# Altium PCB Copy of ESP32.PcbDoc
Units mm, origin at the board's own origin, x right, y up, seen from the top; angles counter-clockwise.
Board outline 32.26 x 92 mm, 4 copper layers (Top Layer, Int1 (GND), Int2 (PWR), Bottom Layer), stack 1.591 mm thick; 55 components, 46 nets, 241 pads, 97 vias.
Unrouted connection lines stored in the file: 1.
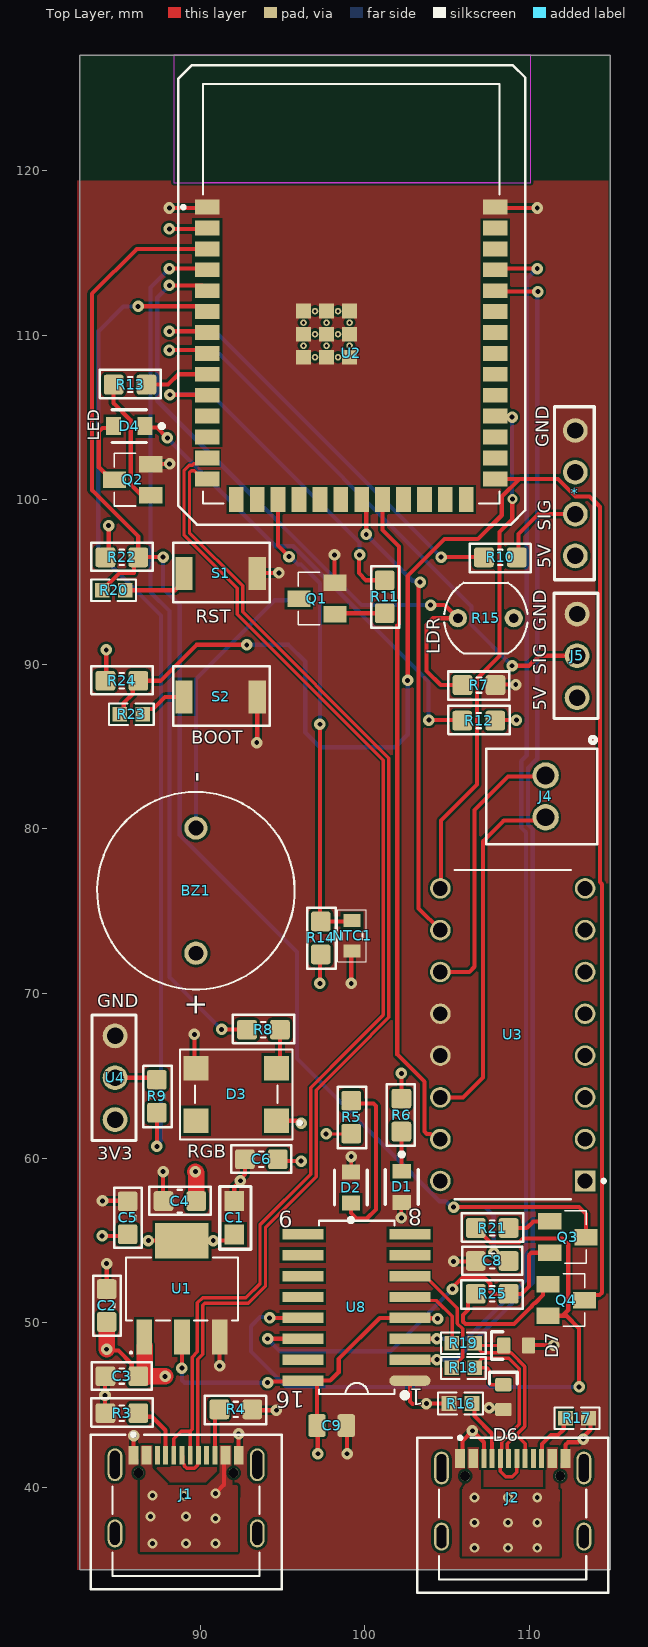
[diagram p0: Top Layer view]
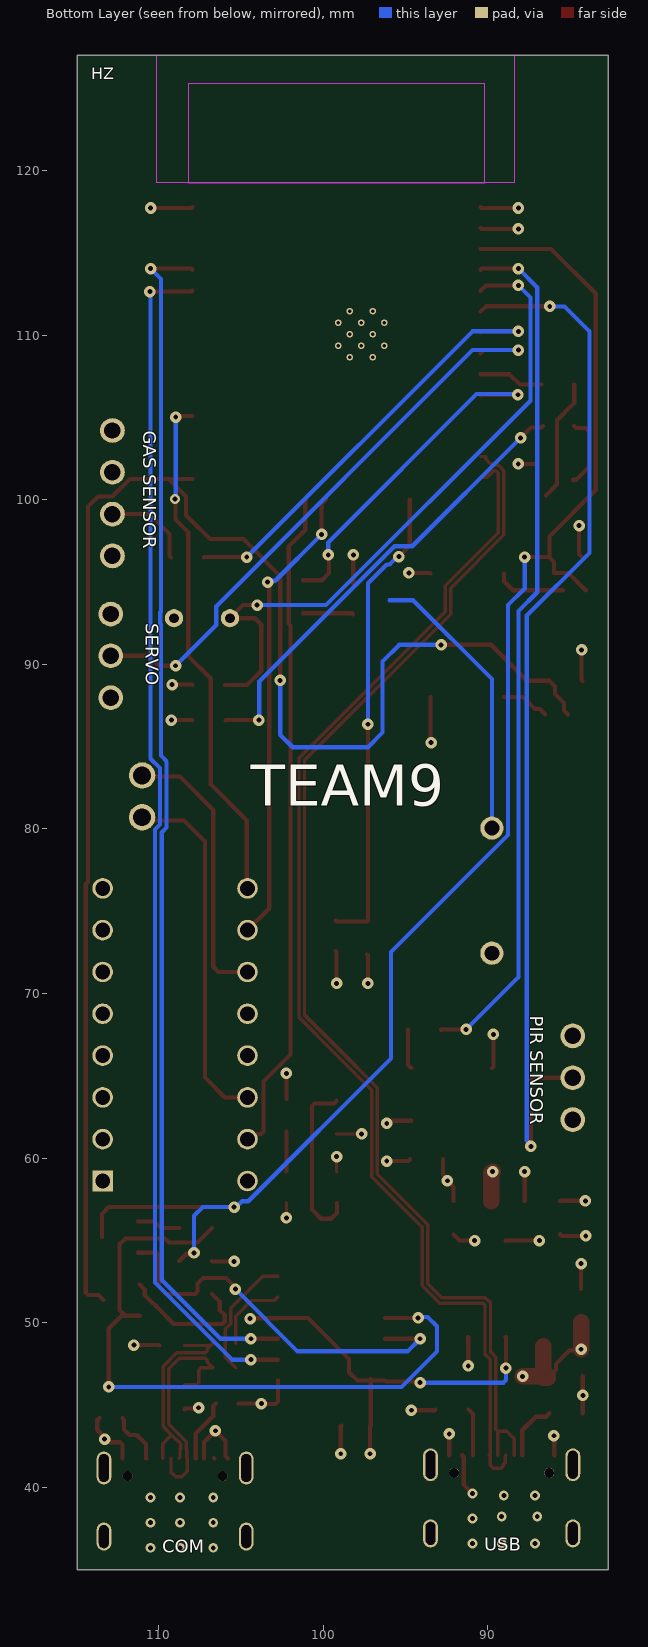
[diagram p1: Bottom Layer view, seen from below]
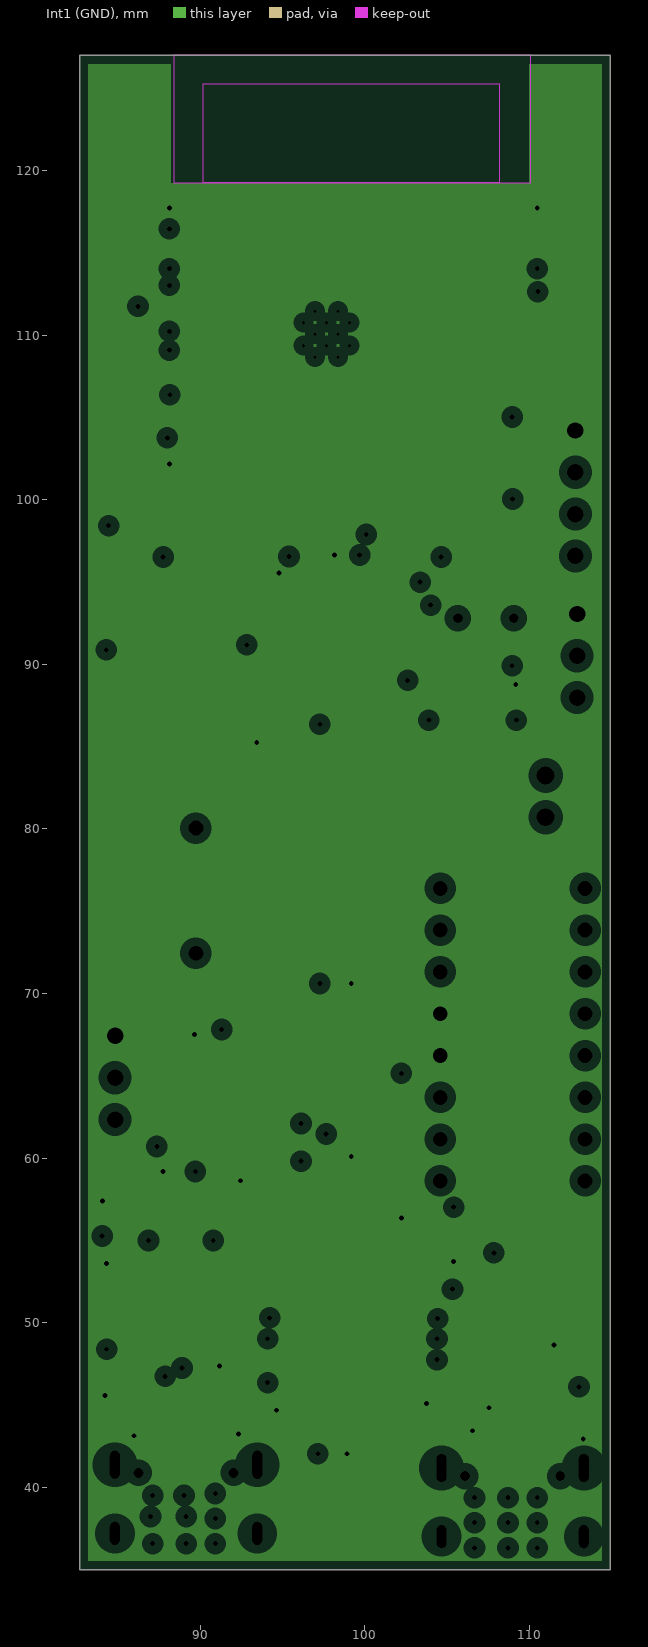
[diagram p2: Int1 (GND), clearances drawn from the general rule]
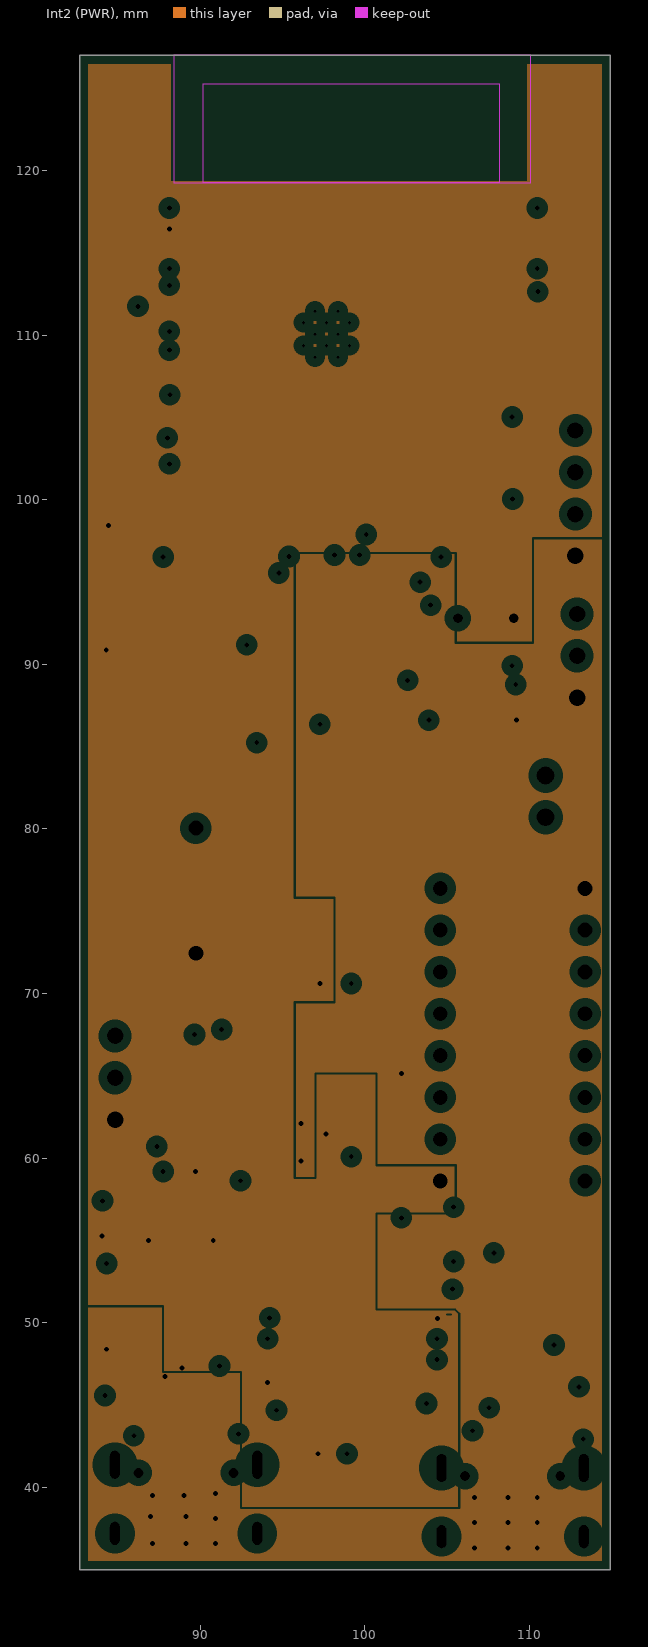
[diagram p3: Int2 (PWR), clearances drawn from the general rule]

## Layer stack, top to bottom
Top Solder: solder mask 0.0254, SM-001, Dk 4
Top Layer: signal copper 0.035
Dielectric 2: prepreg 0.2104, PP-017, Dk 4.3
Int1 (GND): plane copper 0.0175, net GND
Dielectric 3: core 1.065, Core-039, Dk 4.6
Int2 (PWR): plane copper 0.0175, net (Multiple Nets)
Dielectric 4: prepreg 0.2104, PP-017, Dk 4.3
Bottom Layer: signal copper 0.035
Bottom Solder: solder mask 0.0254, SM-001, Dk 4

## Board outline
82.677,35 114.935,35 114.935,127 82.677,127

## Design rules (kind name [scope] priority, off if disabled: settings)
Clearance "difff clearance" [InDifferentialPairClass('DIFF90')] p1: gap=0.102 ignorepadtopadclearanceinfootprint=TRUE
Clearance [All] p2: gap=0.152 ignorepadtopadclearanceinfootprint=TRUE
DiffPairsRouting DIFF90 [InDifferentialPairClass('All Differential Pairs')] p1: maxlimit=0.127 minlimit=0.127 mostfreqgap=0.127 toplayer_minwidth=0.102 toplayer_maxwidth=0.208 toplayer_prefwidth=0.208 bottomlayer_minwidth=0.102 bottomlayer_maxwidth=0.208 bottomlayer_prefwidth=0.208 impedanceprofiledriven=TRUE impedanceprofileid={DB8AAC73-E7F6-452D-B68F-6345AC02EC85} impedanceprofilevalue=90.000000 maxuncoupledlength=12.7
HoleToHoleClearance [All] p1: gap=0.203 allowstackedmicrovias=TRUE
PlaneClearance [All] p1: clearance=0.508
PlaneConnect [All] p1: planeconnectstyle=Direct reliefexpansion=0.508 reliefentries=4 reliefconductorwidth=0.254 reliefairgap=0.254
PolygonConnect [All] p1: connectstyle=Direct reliefconductorwidth=0.254 reliefentries=4 polygonreliefangle="90 Angle" airgapwidth=0.254
RoutingVias [All] p1: holewidth=0.3 width=0.7 viastyle="Through Hole" minholewidth=0.15 minwidth=0.25 maxholewidth=0.711 maxwidth=1.27
SolderMaskExpansion [All] p1: expansion=0.102 istentingtop=FALSE
SupplyNets "Schematic Supply Nets_4" [InNet('GND')] p1: voltage=0.000
SupplyNets "Schematic Supply Nets_3" [InNet('+3V3')] p2: voltage=0.000
SupplyNets "Schematic Supply Nets" [InNet('+5V')] p3: voltage=0.000
UnRoutedNet [All] p1: checkbadconnections=TRUE
Width [All] p1: maxlimit=1 minlimit=0.2 preferedwidth=0.254
25 further rules are at their usual default settings.

## Classes and differential pairs
differential pair class DIFF90: D DPP USBC
differential pair USBC: +USBC_P -USBC_N
differential pair DPP: +DPP_P -DPP_N
differential pair D: +D_P -D_N

## Components (designator, comment, footprint, x,y, rotation, side; value= is the part's Value field where it differs from the comment)
* "4 female header" "4 female header" 112.907,100.425 r90 top
BZ1 "buzzer" buzzer 89.75,76.25 r90 top
C1 "10uF" cap_0805 92.079,56.373 r270 top
C2 "0.1uF" CAPC1608X50N 84.328,51.039 r270 top
C3 "0.1uF" CAPC1608X50N 85.25,46.75 r0 top
C4 "22uF" CAPC2012X125N 88.777,57.389 r0 top
C5 "0.1uF" CAPC1608X50N 85.602,56.373 r270 top
C6 "CAP-0.1uF" CAPC1608X50N 93.726,59.929 r0 top
C8 "CAP-0.1uF" CAPC1608X50N 107.75,53.75 r0 top
C9 "cap_100nF" CAPC100nf 98,43.75 r180 top
D1 "RED LED" "RED LED" 101.981,58.547 r270 top
D2 "GREEN LED" "RED LED" 99.441,57.912 r90 top
D3 "RGB" RGB_LED 92.202,63.866 r180 top
D4 "RED LED" "RED LED" 86,104.75 r180 top
D6 "D_TVS_BI_0603" D_0603 108.331,45.593 r90 top
D7 "D_TVS_BI_0603" D_0603 109.093,48.514 r180 top
J1 "USB-TYPE C" "Korean Hroparts Elec TYPE-C-31-M-12" 89.154,37.196 r0 top
J2 "USB-TYPE C" "Korean Hroparts Elec TYPE-C-31-M-12" 109,37 r0 top
J4 "Motor_ter" motor_terminal 111,83.25 r270 top
J5 "servo" "3 pin header 100 mils" 112.907,90.519 r90 top
NTC1 "10Kohm" THERM_NTCG203NH103JT1S 99.237,73.502 r90 top
Q1 "MMSS8050-H-TP" "SOT 23-3" 97.1,93.873 r270 top
Q2 "MMSS8050-H-TP" "SOT 23-3" 85.906,101.093 r270 top
Q3 "MMSS8050-H-TP" "SOT 23-3" 112.35,55.327 r90 top
Q4 "MMSS8050-H-TP" "SOT 23-3" 112.25,51.5 r90 top
R3 "5.1Kohm" RES 85.25,44.5 r0 top
R4 "5.1Kohm" RES 92.177,44.729 r180 top
R5 "1Kohm" RES 99.187,62.484 r270 top
R6 "5.1Kohm" RES 102.235,62.611 r90 top
R7 "10Kohm" RES 106.95,88.741 r180 top
R8 "220ohm" RES 93.853,67.803 r0 top
R9 "10Kohm" RES 87.376,63.754 r270 top
R10 "RES-10Kohm" RES 108.25,96.5 r180 top
R11 "1Kohm" RES 101.219,94.107 r270 top
R12 "220ohm" RES 106.934,86.582 r0 top
R13 "1Kohm" RES 85.75,107 r0 top
R14 "10Kohm" RES 97.332,73.375 r270 top
R15 "gl5539" XDCR_PDV-P8003 107.364,92.805 r0 top
R16 "5.1K" RES_0603 105.829,45.085 r0 top
R17 "5.1K" RES_0603 112.903,44.196 r0 top
R18 "10R" RES_0603 106,47.25 r180 top
R19 "10R" RES_0603 106,48.75 r180 top
R20 "100R" RES_0603 84.75,94.5 r0 top
R21 "RES-10Kohm" RES 107.75,55.75 r0 top
R22 "RES-10Kohm" RES 85.25,96.5 r0 top
R23 "100R" RES_0603 85.827,86.97 r0 top
R24 "RES-10Kohm" RES 85.25,89 r0 top
R25 "RES-10Kohm" RES 107.75,51.75 r180 top
S1 "XUNPU TS-1088-AR02016" "XUNPU TS-1088-AR02016" 91.25,95.5 r0 top
S2 "XUNPU TS-1088-AR02016" "XUNPU TS-1088-AR02016" 91.25,88 r0 top
U1 "ic_AMS_1117" "ams1117 ic" 88.777,52.055 r90 top
U2 "ESP32-S3-WROOM-1" ESP32-S3-WROOM-1 99.187,112.522 r0 top
U3 "L293D" l293D 109,67.5 r180 top
U4 "PIR MODULE" "3 pin header 100 mils" 84.836,64.882 r90 top
U8 "CH340C" PCBComponent_1 99.2,52.1 r180 top

## Footprints (in the part's own frame and the unit in brackets; to place one, negate y for a bottom-side part, rotate by r counter-clockwise, add the part's x,y. Pads: shape width x height; smd on the part's side, far side on the other; paste and mask are expansions set on the pad)
"3 pin header 100 mils" [mm]
  round 1.5 hole 1 mask+0.3: 1(-2.54,0) 2(0,0) 3(2.54,0)
  silkscreen extent -3.81,-1.27 3.81,1.4, body extent -3.81,-1.27 3.81,1.27, height 8.74
"4 female header" [mm]
  round 1.5 hole 1 mask+0.3: 1(-3.835,0.102) 2(-1.295,0.102) 3(1.245,0.102) 4(3.785,0.102)
  silkscreen extent -5.28,-1.04 5.23,1.37, body extent -5.36,-1.09 5.31,1.45, height 8.51
"ams1117 ic" [mm]
  rect 2.15x0.95 smd: gnd(-2.925,-2.427) vin(-2.925,2.173) vout(-2.925,-0.127)
  rect 2.15x3.25 smd: vout(2.925,-0.127)
  silkscreen extent -3.94,-3.54 1.91,3.29, body extent -1.75,-3.38 1.75,3.12, height 1.8
buzzer [mm]
  round 1.408 hole 0.9: N(3.8,0) P(-3.8,0)
  silkscreen extent -6,-6 6,6, body extent -6,-6 6,6, height 7
cap_0805 [mm]
  rect 1.2x1.2 smd: 1(-1.016,0) 2(1.016,0)
  silkscreen extent -1.91,-0.89 1.9,1.02, body extent -1,-0.63 1,0.63, height 0.4
CAPC100nf [mm]
  rrect25% 1.05x1.38 smd: 1(-0.888,0) 2(0.888,0)
  body extent -1,-0.63 1,0.63, height 0.95
CAPC1608X50N [mm] "Chip Capacitor, 2-Leads, Body 1.60x0.80mm, IPC Medium Density"
  rrect25% 1.2x1.2 smd: 1(-1,0) 2(1,0)
  silkscreen extent -1.83,-0.82 1.82,0.85, body extent -0.8,-0.4 0.8,0.4, height 0.5
CAPC2012X125N [mm] "Chip Capacitor, 2-Leads, Body 2.00x1.25mm, IPC Medium Density"
  rrect25% 1.2x1.2 smd: 1(-1,0) 2(1,0)
  silkscreen extent -1.88,-0.82 1.87,0.87, body extent -1,-0.63 1,0.63, height 1.25
D_0603 [mm]
  rrect25% 0.8x1 smd: A(-0.863,-0.1) K(0.637,-0.1)
  silkscreen extent 0.69,-0.94 1.39,0.74, body extent -0.91,-0.55 0.69,0.35, height 0.81
ESP32-S3-WROOM-1 [mm]
  rect 1.5x0.9 smd: 1(-8.75,5.26) 2(-8.75,3.99) 3(-8.75,2.72) 4(-8.75,1.45) 5(-8.75,0.18) 6(-8.75,-1.09) 7(-8.75,-2.36) 8(-8.75,-3.63) 9(-8.75,-4.9) 10(-8.75,-6.17) 11(-8.75,-7.44) 12(-8.75,-8.71) 13(-8.75,-9.98) 14(-8.75,-11.25) 27(8.75,-11.25) 28(8.75,-9.98) 29(8.75,-8.71) 30(8.75,-7.44) 31(8.75,-6.17) 32(8.75,-4.9) 33(8.75,-3.63) 34(8.75,-2.36) 35(8.75,-1.09) 36(8.75,0.18) 37(8.75,1.45) 38(8.75,2.72) 39(8.75,3.99) 40(8.75,5.26)
  rect 0.9x1.5 smd: 15(-6.985,-12.5) 16(-5.715,-12.5) 17(-4.445,-12.5) 18(-3.175,-12.5) 19(-1.905,-12.5) 20(-0.635,-12.5) 21(0.635,-12.5) 22(1.905,-12.5) 23(3.175,-12.5) 24(4.445,-12.5) 25(5.715,-12.5) 26(6.985,-12.5)
  rect 0.9x0.9 smd: 41(-2.9,-3.86) 41(-2.9,-2.46) 41(-2.9,-1.06) 41(-1.5,-3.86) 41(-1.5,-2.46) 41(-1.5,-1.06) 41(-0.1,-3.86) 41(-0.1,-2.46) 41(-0.1,-1.06)
  round 0.4 hole 0.2 mask+0: 41_10(-1.5,-1.76) 41_11(-2.9,-1.76) 41_12(-0.1,-1.76) 41_13(-2.9,-3.16) 41_14(-1.5,-3.16) 41_15(-0.1,-3.16) 41_16(-2.2,-1.06) 41_17(-0.8,-1.06) 41_18(-2.2,-2.46) 41_19(-0.8,-2.46) 41_20(-2.2,-3.86) 41_21(-0.8,-3.86)
  Keep-Out Layer region: 9,6.75 -9,6.75 -9,12.75 9,12.75
  Keep-Out Layer region: 9,6.75 -9,6.75 -9,12.75 9,12.75
  silkscreen extent -10.52,-14.03 10.57,13.88, body extent -9,-12.75 9,12.75, height 3.25
"Korean Hroparts Elec TYPE-C-31-M-12" [mm] "CONN RCPT Type-C 16POS SMD"
  rect 0.6x1.14 smd mask+0.05: A1_B12(-3.2,4.75) A4_B9(-2.4,4.75) B1_A12(3.2,4.75) B4_A9(2.4,4.75)
  rect 0.3x1.14 smd mask+0.05: A5(-1.25,4.75) A6(-0.25,4.75) A7(0.25,4.75) A8(1.25,4.75) B5(1.75,4.75) B6(0.75,4.75) B7(-0.75,4.75) B8(-1.75,4.75)
  oval 0.9x2 hole 0.6 slot 1.7 at 90 deg: S1(-4.325,4.17) S2(4.325,4.17)
  oval 0.9x1.7 hole 0.6 slot 1.4 at 90 deg: S3(-4.325,0) S4(4.325,0)
  round 0.6 hole 0.6 unplated: ""(-2.89,3.68) ""(2.89,3.68)
  silkscreen extent -5.8,-3.4 5.8,6.1, body extent -4.47,-2.6 4.47,5.31, height 3.31
l293D [mm]
  rect 1.25x1.25 / inner round 1.25 / far side rect 1.25x1.25 hole 0.9: 1(-4.4,8.89)
  round 1.25 hole 0.9: 2(-4.4,6.35) 3(-4.4,3.81) 4(-4.4,1.27) 5(-4.4,-1.27) 6(-4.4,-3.81) 7(-4.4,-6.35) 8(-4.4,-8.89) 9(4.4,-8.89) 10(4.4,-6.35) 11(4.4,-3.81) 12(4.4,-1.27) 13(4.4,1.27) 14(4.4,3.81) 15(4.4,6.35) 16(4.4,8.89)
  silkscreen extent -5.63,-10 3.55,10, body extent -4.62,-10 4.62,10, height 5.1
motor_terminal [mil]
  round 63 hole 43: 1(0,0) 2(100,0)
  silkscreen extent -92,-142 164,123, body extent -58,-140 160,116, height 394
PCBComponent_1 [mm]
  oval 2.5x0.635 smd mask+0.076: 1(-3.55,5.62)
  rect 2.5x0.635 smd mask+0.076: 2(-3.55,4.35) 3(-3.55,3.08) 4(-3.55,1.81) 5(-3.55,0.54) 6(-3.55,-0.73) 7(-3.55,-2) 8(-3.55,-3.27) 9(2.95,-3.27) 10(2.95,-2) 11(2.95,-0.73) 12(2.95,0.54) 13(2.95,1.81) 14(2.95,3.08) 15(2.95,4.35) 16(2.95,5.62)
  silkscreen extent -3.37,-4.1 1.96,6.64, body extent -3.32,-3.77 2.68,6.13, height 1.4
"RED LED" [mm]
  rect 0.9x1.1 smd paste+0 mask+0: 1(-0.65,0.275) 2(1.25,0.275)
  silkscreen extent -1.8,-0.73 1.35,1.27, body extent -1.2,-0.53 1.8,1.08, height 0.25
RES [mm] "Chip Resistor, 2-Leads, Body 1.60x0.80mm, IPC Medium Density"
  rrect25% 1.2x1.2 smd: 1(-1,0) 2(1,0)
  silkscreen extent -1.85,-0.83 1.87,0.9, body extent -0.8,-0.4 0.8,0.4, height 0.45
RES_0603 [mil] "CASE: 0603"
  rect 35x35 smd mask+3: 1(-27.5,0) 2(27.5,0)
  silkscreen extent -53,-26 54,26, body extent -31,-16 31,16, height 18
RGB_LED [mm]
  rect 1.5x1.5 smd: 1(-2.45,1.6) 2(-2.45,-1.6) 3(2.45,-1.6) 4(2.45,1.6)
  silkscreen extent -3.95,-2.74 3.43,2.74, body extent -2.7,-2.5 2.7,2.5, height 1.6
"SOT 23-3" [mm] "Case: SOT23"
  rect 1x1.4 smd paste+0 mask+0.076: 1(0.823,1.1) 2(-1.077,1.1) 3(-0.127,-1.1)
  silkscreen extent -1.73,-1.12 1.47,0.17, body extent -1.63,-1.5 1.37,1.5, height 1.3
THERM_NTCG203NH103JT1S [mm]
  rect 0.8x1.05 smd: 1(-0.925,0) 2(0.925,0)
  silkscreen extent -1.57,-0.88 1.58,0.87, body extent -1,-0.6 1,0.6, height 1.3
XDCR_PDV-P8003 [mm]
  round 1.108 hole 0.6: 1(-1.7,0) 2(1.7,0)
  silkscreen extent -2.53,-2.15 2.53,2.15, body extent -2.54,-2.14 2.54,2.14, height 2.38
"XUNPU TS-1088-AR02016" [mm] "SWITCH TACTILE SPST 160gf SMD"
  rect 1.05x2 smd: 1(-2.225,0.025) 2(2.225,0.025)
  silkscreen extent -2.88,-1.72 3,1.9, body extent -2.48,-1.35 2.32,1.55, height 2

## Part data
*: "CONN SOCKET 4POS 2.54mm SINGLE ROW TH", MFR="BOOMELE(Boom Precision Elec)", MPN=2.54-1*4P, ComponentLink1Description=link, ComponentLink1URL=https://www.lcsc.com/product-detail/C2718488.html?s_z=n_q_t_Female%2520Header%25202.54mm&spm=wm.fly.bg.2.stp___wm.ssy.tc.0.tz&lcsc_vid=RwUNAlQEFVQKBl1XEgMNU1FXTwNbUQdRRANXVFFRFVMxVlNeT1JaXldUQlZWUjsOAxUeFF5JWBYZEEoKFBINSQcJGk4NBhADEA4cHktRTlJADxALGw%3D%3D, supplier=LCSC, supplier part #=C2718488
BZ1: "BUZZER MAGNETIC 4V~8V 12mm TH", MFR=Huaneng, MPN=TMB12A05, ComponentLink1Description="New link", supplier=LCSC, supplier part #=C96093
C1: library part Cap_10uF, MFR="Samsung Electro-Mechanics", MFR part*=CL21A106KAYNNNE, ComponentLink1Description=datasheet, ComponentLink1URL=FgNZXwIFQgRbX1BSE1YMAwJTQFFaV1ACT1lWXwYHElExVlNeQVVaXlRSQFNZVzsOAxUeFF5JWBYZEEoKFBINSQcJGk4NBhADEA4cHktURFVfSQwSGg0, supplier=*lcsc, supplier part*=C15850
C2 C3 C5: library part CAP-0.1uF, "CAP CER 100nF 50V X7R 0603", Manufactor="Samsung Electro-Mechanics", ComponentLink1Description="New link", ComponentLink1URL=https://www.lcsc.com/product-detail/C1591.html?s_z=n_q_t_Capacitors%25200.1uF&spm=wm.fly.bg.0.cbh___wm.ssy.tc.0.tz&lcsc_vid=FgNZXwIFQgRbX1BSE1YMAwJTQFFaV1ACT1lWXwYHElExVlNeT1NfVlRfT1VbXjsOAxUeFF5JWBYZEEoKFBINSQcJGk4NBhADEA4cHktXRlVcSQwSGg0%3D, MFN=CL10B104KB8NNNC, SPN=C1591, supplier=LCSC
C4: library part CAP-22uF, "CAP CER 22uF 25V X5R 0805", Manufactor=muRata, ComponentLink1Description="New link", ComponentLink1URL=https://www.lcsc.com/product-detail/C86816.html?s_z=n_q_t_Capacitors%252022uF&spm=wm.fly.bg.0.cbh___wm.ssy.tc.2.tz&lcsc_vid=FgNZXwIFQgRbX1BSE1YMAwJTQFFaV1ACT1lWXwYHElExVlNeT1NfVlZVT1FZUTsOAxUeFF5JWBYZEEoKFBINSQcJGk4dAgUUFAk%3D, MFN=GRM21BR61E226ME44L, SPN=C86816, supplier=LCSC
C6 C8: "CAP CER 100nF 50V X7R 0603", Manufactor="Samsung Electro-Mechanics", ComponentLink1Description="New link", ComponentLink1URL=https://www.lcsc.com/product-detail/C1591.html?s_z=n_q_t_Capacitors%25200.1uF&spm=wm.fly.bg.0.cbh___wm.ssy.tc.0.tz&lcsc_vid=FgNZXwIFQgRbX1BSE1YMAwJTQFFaV1ACT1lWXwYHElExVlNeT1NfVlRfT1VbXjsOAxUeFF5JWBYZEEoKFBINSQcJGk4NBhADEA4cHktXRlVcSQwSGg0%3D, MFN=CL10B104KB8NNNC, SPN=C1591, supplier=LCSC
C9: "CAP CER 100nF 50V X7R 0805", MFR="Samsung Electro-Mechanics", MPN=CL21B104KBCNNNC, Package="SMD-2 Samsung", SnapEDA_Link=https://www.snapeda.com/parts/CL21B104KBCNNNC/Samsung/view-part/?ref=snap, supplier=lcsc, supplier part #=C1711
D1 D4: "LED RED 0603 SMD", Manufactor="YONGYUTAI YLED0603B", MPN=YLED0603B, ComponentLink1Description="New link", ComponentLink1URL=https://www.lcsc.com/product-detail/C19171390.html?s_z=n_q_C19171390&globalKeyword=C19171390, SPN=C19171390, supplier=LCSC
D2: "LED GREEN WATER CLEAR 0603 SMD", Manufactor=HONGLITRONIC, MPN=PSC-1608U52GC-G4, ComponentLink1Description="New link", ComponentLink1URL=https://www.lcsc.com/product-detail/C22371297.html?s_z=n_q_LED%2520GREEN%25200603%2520SMD&spm=wm.fly.bg.0.cbh&lcsc_vid=RwJaUAYDQFdbVQJWRFldAwZXT1FfBlJXEVZaAgZTTwQxVlNeT1JXVlNXQ1FXXjsOAxUeFF5JWBYZEEoKFBINSQcJGk4eFQsCAgIaSgADAwAHC0slRlhfUFVVTlFADxALGw%3D%3D, SPN=C22371297, supplier=LCSC
D3: "SMD 5050 Full color RGB LED data transmission frequency up to 800Kbps, with 30 fps refresh rate, 5.00x5.00 mm", MFR="Shenzhen LED Color Optoelectronic Inc.", MPN="SMD-4 Shenzhen LED Color Optoelectronic Inc.", supplier=LCSC, supplier part #=None
D6 D7: "Diode TVS / ESD Bidirectional 0603"
J1 J2: "CONN RCPT Type-C 16POS SMD", Manufactor="Korean Hroparts Elec", MPN=TYPE-C-31-M-12, ComponentLink1Description="New link", ComponentLink1URL=https://www.lcsc.com/product-detail/C165948.html?s_z=n_q_p_USB%2520TYPE%2520C&spm=wm.ssy.bg.1.cbh&lcsc_vid=RwJaUAYDQFdbVQJWRFldAwZXT1FfBlJXEVZaAgZTTwQxVlNeT1JYUFVVRlNWUDsOAxUeFF5JWBYZEEoKFBINSQcJGk4NBhADEA4cHktXRlhXSQwSGg0%3D, SPN=C165948, supplier=LCSC
J4: "TERM BLK 2POS 2.54mm TH", MFR=Molex, MPN=397730002, supplier=lcsc, supplier part #=C6957573
J5: library part "FAN/DC MOTOR", MFR=Harwin, MPN=M20-9990346, supplier=LCSC, supplier part #=C5355646
NTC1: library part NTCG203NH103JT1S, "10kΩ 440uA 3590K ±5% 200mW ±3% 0805 NTC Thermistors RoHS", Manufactor=TDK, ComponentLink1Description="New link", ComponentLink1URL=https://www.lcsc.com/product-detail/C3153798.html?s_z=n_q_NTCG203NH103JT1S&spm=wm.fly.bg.0.xh&lcsc_vid=RwJaUAYDQFdbVQJWRFldAwZXT1FfBlJXEVZaAgZTTwQxVlNeT1ZfU1xeQFlfXjsOAxUeFF5JWBYZEEoKFBINSQcJGk4NBhADEA4cHktQRVVADxALGw%3D%3D, MPN=NTCG203NH103JT1S, SPN=C3153798, supplier=LCSC
Q1 Q2 Q3 Q4: library part TRNS-NPN_25V-1.5A-SOT23, "Bipolar (BJT) Transistor NPN 25V 1.5A 100MHz 625mW Surface Mount SOT-23", Alternate Part Number-1=NA, Case/Package=SOT-23, Manufacturer=MCC, Manufacturer Part Number=MMSS8050-H-TP, Supplier Part Number-1=MMSS8050-H-TP, Supplier-1=MOUSER
R3 R4 R6: library part RES-5.1Kohm, "RES 5.1kΩ ±1% 100mW 0603", Manufactor=FOJAN, ComponentLink1Description="New link", ComponentLink1URL=https://www.lcsc.com/product-detail/C2907044.html?s_z=n_q_t_res%25205.1kohm&spm=wm.fly.bg.0.cbh___wm.ssy.tc.0.tz&lcsc_vid=RwJaUAYDQFdbVQJWRFldAwZXT1FfBlJXEVZaAgZTTwQxVlNeT1JYU1BUT1FdVTsOAxUeFF5JWBYZEEoKFBINSQcJGk4dAgUUFAk%3D, MFN=FRC0603F5101TS, SPN=C2907044, supplier=LCSC
R5 R11 R13: library part RES_1Kohm, "RES 1kΩ ±1% 100mW 0603", Manufactor=FOJAN, MPN=FRC0603F1001TS, ComponentLink1Description="New link", ComponentLink1URL=https://www.lcsc.com/product-detail/C2907002.html?s_z=n_q_t_RES%25201KOHM&spm=wm.fly.bg.0.cbh___wm.ssy.tc.0.tz&lcsc_vid=RwJaUAYDQFdbVQJWRFldAwZXT1FfBlJXEVZaAgZTTwQxVlNeT1JXVVRQQVBZUzsOAxUeFF5JWBYZEEoKFBINSQcJGk4NBhADEA4cHktSRlNADxALGw%3D%3D, SPN=C2907002, supplier=LCSC
R7 R9 R14: library part RES-10Kohm, "RES 10kΩ ±1% 100mW 0603", Manufactor=YAGEO, ComponentLink1Description="New link", ComponentLink1URL=https://www.lcsc.com/product-detail/C98220.html?s_z=n_q_t_RESISTOR%252010K%25CE%25A9&spm=wm.fly.bg.0.cbh___wm.ssy.tc.0.tz&lcsc_vid=FgNZXwIFQgRbX1BSE1YMAwJTQFFaV1ACT1lWXwYHElExVlNeT1NeXlZQRVRWVjsOAxUeFF5JWBYZEEoKFBINSQcJGk4NBhADEA4cHktXRlhXSQwSGg0%3D, MFN=RC0603FR-0710KL, SPN=C98220, supplier=LCSC
R8 R12: library part RES_220ohm, "RES 220Ω ±1% 100mW 0603", Manufactor=UNI-ROYAL, MPN=0603WAF2200T5E, ComponentLink1Description="New link", ComponentLink1URL=https://www.lcsc.com/product-detail/C22962.html?s_z=n_q_t_res%2520220ohm&spm=wm.fly.bg.0.cbh___wm.ssy.tc.0.tz&lcsc_vid=RwJaUAYDQFdbVQJWRFldAwZXT1FfBlJXEVZaAgZTTwQxVlNeT1ddUFRWT1BZXzsOAxUeFF5JWBYZEEoKFBINSQcJGk4eFQsCAgIaSgADAwAHC0slRlhfUFVVTlVADxALGw%3D%3D, SPN=C22962, supplier=LCSC
R10 R21 R22 R24 R25: "RES 10kΩ ±1% 100mW 0603", Manufactor=YAGEO, ComponentLink1Description="New link", ComponentLink1URL=https://www.lcsc.com/product-detail/C98220.html?s_z=n_q_t_RESISTOR%252010K%25CE%25A9&spm=wm.fly.bg.0.cbh___wm.ssy.tc.0.tz&lcsc_vid=FgNZXwIFQgRbX1BSE1YMAwJTQFFaV1ACT1lWXwYHElExVlNeT1NeXlZQRVRWVjsOAxUeFF5JWBYZEEoKFBINSQcJGk4NBhADEA4cHktXRlhXSQwSGg0%3D, MFN=RC0603FR-0710KL, SPN=C98220, supplier=LCSC
R15: "Dark Resistance:10MΩ Cell Resistance @ Illuminance:50kΩ~100kΩ Cell Resistance @ Illuminance:50kΩ~100kΩ Voltage - Max:150V Wavelength - Peak:540nm Rise Time:20ms Fall Time:30ms Operating Temperature:-30℃~+70℃ Operating Temperature:-30℃~+70℃ γ Value:0.8", Cell Resistance @ Illuminance=50kΩ~100kΩ, Dark Resistance=10MΩ, JLCPCB Part Class="Extended Part", LCSC Part Name=GL5539, Manufacturer=森霸, Operating Temperature=-30℃~+70℃, Voltage - Max=150V, γ Value=0.8, AddInBom=yes, ConvertToPcb=yes, Datasheet=https://item.szlcsc.com/datasheet/GL5539/136908.html, Fall Time=30ms, FootprintName=RES-TH_L5.1-W4.3-P3.40-D0.5, ManufacturerPart=GL5539, ModelId=50a77439f2ea4df19a538b7b9a8c09e6, ModelName=RES-TH_L5.1-W4.3-P3.40-D0.5, ModelTransform=169.291,200.39669,0,0,0,0,-3.937,0,-137.795, Rise Time=20ms, supplier=LCSC, Supplier Footprint=插件,P=3mm, SupplierPart=C125630, Symbol=GL5539, Wavelength - Peak=540nm
R16 R17: library part RES_4.7K-0.1W-1%-0603, "4.7 kOhms ±1% 0.1W, 1/10W Chip Resistor 0603 (1608 Metric) Moisture Resistant Thick Film", Alternate Part Number-1=MR06X4701FTL, Case/Package=0603, Manufacturer=Walsin, Manufacturer Part Number=WR06X4701FTL, Supplier Part Number-1=WR06X4701FTL, Supplier-1=SIRICOM
R18 R19: library part RES_10R-0.1W-1%-0603, "10 Ohms ±1% 0.1W, 1/10W Chip Resistor 0603 (1608 Metric) Automotive AEC-Q200, Moisture Resistant Thick Film", Alternate Part Number-1=RS-03K10R0FT, Case/Package=0603, Manufacturer=Walsin, Manufacturer Part Number=WR06X10R0FTL, Supplier Part Number-1=WR06X10R0FTL, Supplier-1=SIRICOM
R20 R23: library part RES_100R-0.1W-1%-0603, "100 Ohms ±1% 0.1W, 1/10W Chip Resistor 0603 (1608 Metric) Thick Film", Alternate Part Number-1=MR06X1000FTL, Case/Package=0603, Manufacturer=Walsin, Manufacturer Part Number=WR06X1000FTL, Supplier Part Number-1=WALSIN:WR06X1000FTL, Supplier-1=SIRICOM
S1 S2: "SWITCH TACTILE SPST 160gf SMD", Manufactor=XUNPU, MPN=TS-1088-AR02016, ComponentLink1Description="New link", ComponentLink1URL=https://www.lcsc.com/product-detail/C720477.html?s_z=n_q_t_SWITCH&spm=wm.fly.bg.0.cbh___wm.ssy.tc.0.tz&lcsc_vid=FgNZXwIFQgRbX1BSE1YMAwJTQFFaV1ACT1lWXwYHElExVlNeT1BXX11UT1dfVzsOAxUeFF5JWBYZEEoKFBINSQcJGk4NBhADEA4cHktRTlVADxALGw%3D%3D, SPN=C720477, supplier=LCSC
U1: "1A Low Dropout (LDO) Regulator", MFR="Advanced Monolithic Systems", MFR part #=AMS1117-3.3, ComponentLink1Description=datasheet, ComponentLink1URL=https://www.lcsc.com/datasheet/C6186.pdf?spm=wm.sxq.inf.ggs___wm.fly.bg.0.stp&lcsc_vid=T1lZAgUDR1VfUABTElhaXgZfQFVcUgYHQwJZX1ZTQFAxVlNeQVJeUFFeTlhYUDsOAxUeFF5JWBYZEEoKFBINSQcJGk4NBhADEA4cHktSR1hADxALGw%3D%3D, supplier=lcsc, supplier part #=C6186
U2: "2.4 GHz Wi-Fi + Bluetooth + Bluetooth LE module", Manufactor=ESPRESSIF, ComponentLink1Description="LCSC link", MFN=ESP32-WROOM-32E-N4, SPN=C701341, supplier=LCSC
U3: "Bipolar Motor Driver - Parallel 16-PowerDIP", MFR=ST, ComponentLink1Description=ink, ComponentLink1URL=https://www.lcsc.com/product-detail/C12340.html?s_z=s_p_t_L293D&spm=wm.fly.bg.1.xh___wm.ssy.tc.0.tz&lcsc_vid=RwUNAlQEFVQKBl1XEgMNU1FXTwNbUQdRRANXVFFRFVMxVlNeT1NZUVRWTllfVjsOAxUeFF5JWBYZEEoKFBINSQcJGk4eFQsCAgIaSgADAwAHC0slT1RWU1RIHxUDCw%3D%3D, MPN=L293D, SUP PART #=C12340, supplier=LCSC
U4: library part "3 PIN HEADER 100mils pitch", MFR=Harwin, MPN=M20-9990346, supplier=LCSC, supplier part #=C5355646
U8: library part IC_CH340C, "USB Bridge, USB to UART USB 2.0 UART Interface", Alternate Part Number-1=NA, Case/Package=SOIC16, Manufacturer=Olimex, Supplier Part Number-1=C84681, Manufacturer Part Number=CH340C, Supplier-1=LCSC

## Via types
v1: diameter 0.7, hole 0.3, Top Layer to Bottom Layer, 78 vias
v2: diameter 0.6, hole 0.3, Top Layer to Bottom Layer, 19 vias

## Nets (pads, with @x,y where several pads share a name; then routed paths per layer and width w, separated by ;. In a path a pad name is that pad's centre, name@x,y a point inside that pad or via, vN(x,y) a via of type N, cw(c..) or ccw(c..) an arc to the next point about the centre after c; other vN are vias at no path point)
+3V3: BZ1.P C1.2 C4.2 C5.2 C9.2 R5.2 R14.2 R15.2 R22.1 R24.1 U1.vout U2.2 U3.16 U4.1 U8.4 U8.16 | length 41.3
  Top Layer w0.2: v1(97.663,61.468) 99.171,61.468 R5.2
  Top Layer w0.254: v1(84.049,55.27) 85.499,55.27 C5.2 ; R24.1 84.303,89.053 v1(84.303,90.881) ; R22.1 84.449,96.699 v1(84.449,98.425) ; v1(86.868,54.991) 88.893,54.991 U1.vout@88.904,54.98 ; v1(88.138,116.459) 90.384,116.459 U2.2 ; v1(88.9,47.244) 88.9,49.126 U1.vout@88.904,49.13 ; v1(90.805,54.991) 91.713,54.991 C1.2 ; v1(94.106,46.354) 94.169,46.417 96.187,46.417 U8.16 97.915,46.48 98.425,46.99 98.425,47.793 100.922,50.29 U8.4 102.771,50.269 104.417,50.269 v1(104.439,50.247) ; U8.16@97.112,46.566 C9.2 97.155,43.707 v1(97.155,42.037) ; v1(97.282,70.612) 97.282,72.325 R14.2
  Top Layer w1: v1(89.713,59.182) 89.777,59.118 C4.2
  Bottom Layer w0.254: v1(88.9,47.244) 88.9,46.503 89.049,46.354 v1(94.106,46.354)
+5V: *.1 C2.2 C3.2 C6.2 D3.1 J1.A4_B9 J1.B4_A9 J2.A4_B9 J2.B4_A9 J5.1 R6.2 R12.2 U1.vin U3.8 | length 16.7
  Top Layer w0.254: v1(84.328,48.387) 84.413,48.302 85.048,48.302 85.854,47.496 85.854,47.147 C3.2 ; v2(90.932,39.624) 91.465,40.157 91.465,41.857 J1.B4_A9 ; D3.1 95.855,62.266 96.018,62.103 v1(96.139,62.103) ; C6.2 94.838,59.817 v1(96.139,59.817) ; R6.2 v1(102.235,65.151) ; J2.A4_B9 J2.A4_B9@106.627,41.777 ; R12.2 107.966,86.614 v1(109.22,86.614) ; U3.8 U3.8@113.405,76.396
  Top Layer w1: v1(84.328,48.387) C2.2 ; C3.2@86.35,46.65 86.629,46.65 86.629,47.1 U1.vin@86.629,48.555 ; C3.2@86.35,46.736 v1(87.884,46.736) ; U3.8@113.405,76.396 U3.8@113.411,76.401
  other v2: 106.68,36.322 108.712,36.322 110.49,36.322 87.122,36.576 89.154,36.576 90.932,36.576 106.68,37.846 108.712,37.846 110.49,37.846 90.932,38.1 86.995,38.227 89.154,38.227 106.68,39.37 108.712,39.37 110.49,39.37 87.122,39.497 89.027,39.497
D_N: J1.A7 J1.B7 U2.13 | length 75.3
  Top Layer w0.208: J1.B7 88.404,42.938 88.858,43.392 89.404,43.392 ; J1.A7 89.404,43.392 ; U2.13@90.423,102.631 90.123,102.631 90.123,102.478 89.84,102.196 89.63,102.196 89.526,102.092 89.341,102.092 89.024,101.774 89.024,97.87 92.258,94.636 92.258,93.045 101.138,84.164 101.138,68.693 99.163,66.718 96.719,64.274 96.719,59.016 93.645,55.942 93.645,52.37 92.791,51.516 90.153,51.516 89.835,51.198 89.835,48.221 89.523,47.909 89.523,43.511 89.404,43.392
D_P: J1.A6 J1.B6 U2.14 | length 74.6
  Top Layer w0.208: J1.A6 88.95,41.9 88.95,41.48 89.049,41.381 89.049,41.291 89.194,41.145 89.65,41.145 ; 89.664,41.16 89.858,41.353 89.858,41.9 J1.B6 89.858,41.992 89.858,47.77 90.17,48.082 90.17,51.059 90.292,51.181 92.929,51.181 93.98,52.232 93.98,55.804 97.053,58.877 97.053,64.135 99.302,66.384 101.473,68.555 101.473,84.303 92.592,93.183 92.592,94.774 89.358,98.008 89.358,101.636 89.48,101.757 89.652,101.757 90.048,101.361 U2.14@90.423,101.361
DPP_N: R18.2 U8.6 | length 7.7
  Top Layer w0.208: U8.6 103.683,52.83 105.625,50.887 105.625,49.948 105.951,49.622 105.951,47.9 R18.2
DPP_P: R19.2 U8.5 | length 4.7
  Top Layer w0.208: U8.5 102.964,51.346 104.365,51.346 105.316,50.395 105.316,48.765 R19.2
DTR: Q4.2 R21.1 U8.13 | length 42.2
  Top Layer w0.254: v1(94.234,50.292) v1(94.234,50.292) 96.249,50.291 U8.13 ; R21.1 106.762,55.75 107.642,54.871 109.378,54.871 109.625,55.118 112.014,55.118 112.371,54.761 112.371,50.776 112.082,50.487 ; Q4.2 112.082,50.423 112.264,50.423 113.03,49.657 v1(113.03,46.101)
  Bottom Layer w0.254: v1(94.234,50.292) 94.179,50.347 93.654,50.347 93.091,49.784 93.091,48.26 95.25,46.101 v1(113.03,46.101)
EN: C8.2 Q3.3 R20.1 R22.2 U2.3 | length 93
  Top Layer w0.254: R20.1 85.106,95.555 85.979,95.555 85.979,96.229 R22.2 ; v1(87.757,96.52) 86.27,96.52 R22.2 ; U2.3 86.159,115.242 83.439,112.522 83.439,100.584 86.25,97.773 R22.2 ; v1(105.41,57.023) 113.03,57.023 113.45,56.603 Q3.3 ; v1(107.851,54.241) 107.935,54.157 108.343,54.157 C8.2
  Bottom Layer w0.254: v1(87.757,96.52) 87.757,94.615 88.767,93.605 88.767,79.635 95.885,72.517 95.885,66.046 104.552,57.379 104.934,57.379 105.289,57.023 107.315,57.023 107.844,56.494 107.844,54.249 v1(107.851,54.241)
GND: *.4 C1.1 C2.1 C3.1 C4.1 C5.1 C6.1 C8.1 C9.1 D1.2 D2.2 D3.3 D6.A D7.A J1.A1_B12 J1.B1_A12 J2.A1_B12 J2.B1_A12 J5.3 NTC1.1 Q1.2 Q2.2 R3.1 R4.1 R7.1 R16.1 R17.2 S1.2 S2.2 U1.gnd U2.1 U2.40 U2.41 U3.12 U3.13 U4.3 U8.1 | length 51.7
  Top Layer w0.2: D2.2 99.187,59.183 v1(99.187,60.089) ; v1@102.235,56.261 v1(102.235,56.37) 102.235,57.276 D1.2
  Top Layer w0.254: v1(84.074,57.404) 85.571,57.404 C5.1 ; R3.1 84.226,44.524 v1(84.226,45.577) 84.226,46.726 C3.1 ; C2.1 v1(84.328,53.594) ; J1.A1_B12 85.967,41.959 85.967,43.117 v1(85.979,43.129) ; Q2.2 87.016,102.18 v1(88.149,102.18) ; v1(87.757,59.182) 87.757,57.409 C4.1 ; v1(88.138,117.729) 90.384,117.729 U2.1 ; v1(89.662,67.513) 89.662,65.556 D3.3 ; v1(91.186,47.371) 91.186,49.112 U1.gnd ; C1.1 92.079,58.243 92.456,58.62 v1(92.456,58.623) 92.456,58.744 92.726,59.014 C6.1 ; v1(92.341,43.244) 92.341,41.959 J1.B1_A12 ; R4.1 93.227,44.679 v1(94.643,44.679) ; v1(93.447,85.242) 93.475,85.271 S2.2 ; S1.2 93.505,95.555 v1(94.793,95.555) ; v1(98.171,96.647) 98.171,94.979 Q1.2 ; C9.1 98.933,43.705 v1(98.933,42.037) ; v1(99.187,70.612) 99.187,72.527 NTC1.1 ; U8.1 102.75,45.205 102.901,45.054 103.728,45.054 v1(103.759,45.085) R16.1 ; U3.13@104.597,66.233 U3.13 ; v1(105.41,53.721) 106.721,53.721 C8.1 ; J2.A1_B12 105.941,41.891 105.941,42.822 v1(106.553,43.434) 107.25,42.737 107.25,41.75 ; v1(107.569,44.831) 107.619,44.781 108.381,44.781 D6.A ; U2.40 107.99,117.729 v1(110.49,117.729) ; R7.1 107.982,88.773 v1(109.184,88.773) ; D7.A 109.983,48.641 v1(111.506,48.641) ; J2.B1_A12 112.2,42.582 112.349,42.731 112.968,42.731 113.163,42.926 v1(113.284,42.926) 113.284,43.047 113.729,43.491 113.729,44.069 R17.2
GPIO0: Q4.3 R23.1 R24.2 U2.27 | length 100.9
  Top Layer w0.254: R23.1 85.36,87.202 85.36,87.646 85.911,88.197 85.911,88.661 R24.2 87.603,89 89.789,91.186 v1(92.837,91.186) ; v1(102.616,89.027) 102.616,95.378 104.847,97.609 106.88,97.609 108.331,99.06 108.331,100.203 109.4,101.272 ; U2.27 109.4,101.272 ; Q4.3 113.65,51.673 114.281,51.673 114.429,51.822 114.429,76.64 114.3,76.769 114.3,99.572 114.133,99.739 113.669,100.203 112.816,100.203 111.747,101.272 109.4,101.272
  Bottom Layer w0.254: v1(92.837,91.186) 95.377,91.186 96.393,90.17 96.393,85.852 97.282,84.963 101.854,84.963 102.616,85.725 v1(102.616,89.027)
GPIO4: R8.1 U2.4 | length 52.4
  Top Layer w0.254: v1(88.138,114.046) 90.363,114.046 U2.4 ; v1(91.313,67.818) 92.838,67.818 R8.1
  Bottom Layer w0.254: v1(88.138,114.046) 86.995,112.903 86.995,94.383 88.138,93.24 88.138,70.993 v1(91.313,67.818)
GPIO5: R7.2 R15.1 U2.5 | length 40.9
  Top Layer w0.254: v1(88.138,113.03) 88.143,113.025 90.114,113.025 U2.5 ; v1(104.013,93.599) 104.87,93.599 R15.1 104.159,92.805 103.766,92.412 103.766,89.605 104.629,88.741 R7.2
  Bottom Layer w0.254: v1(88.138,113.03) 87.401,112.293 87.401,106.02 99.822,93.599 v1(104.013,93.599)
GPIO6: R9.2 U2.6 | length 60.6
  Top Layer w0.254: v1@86.237,111.755 90.114,111.755 U2.6 ; v1(87.376,60.706) R9.2
  Bottom Layer w0.254: v1(86.234,111.752) 85.336,111.752 83.82,110.236 83.82,96.774 87.63,92.964 87.63,61.078 87.376,60.824 v1(87.376,60.706)
GPIO7: R10.2 U2.7 | length 27.1
  Top Layer w0.254: v1(88.138,110.236) 90.363,110.236 U2.7 ; v1(104.648,96.52) 107.23,96.52 R10.2
  Bottom Layer w0.254: v1(88.138,110.236) 90.932,110.236 v1(104.648,96.52)
GPIO9: NTC1.2 R14.1 U2.17 | length 28.8
  Top Layer w0.254: U2.17 94.742,97.214 v1(95.407,96.55) ; v1(97.282,86.36) 97.282,74.425 R14.1 99.185,74.375 NTC1.2
  Bottom Layer w0.254: v1(95.407,96.55) 95.481,96.55 95.961,96.07 96.14,96.07 97.282,94.928 v1(97.282,86.36)
GPIO13: U2.21 U3.10 | length 28.5
  Top Layer w0.254: U2.21 100.1,99.744 v1(100.1,97.894) ; v1(103.378,94.996) 103.293,94.911 103.293,94.64 103.276,94.624 103.276,75.174 U3.10
  Bottom Layer w0.254: v1(100.1,97.894) 102.913,95.081 103.293,95.081 v1(103.378,94.996)
GPIO14: U2.22 U3.15 | length 40.7
  Top Layer w0.254: U2.22 101.092,98.171 102.098,97.165 102.098,92.479 101.987,92.367 101.987,66.29 103.632,64.644 103.632,61.617 103.781,61.468 104.012,61.468 104.33,61.15 U3.15
GPIO15: J5.2 U2.8 | length 36
  Top Layer w0.254: v1(88.138,109.093) 90.236,109.093 U2.8 ; v1(108.966,89.916) 109.982,89.916 110.585,90.519 J5.2
  Bottom Layer w0.254: v1(88.138,109.093) 90.932,109.093 106.497,93.528 106.497,92.385 v1(108.966,89.916)
GPIO16: R13.2 U2.9 | length 3.9
  Top Layer w0.254: R13.2 88.052,107 88.674,107.622 U2.9
GPIO17: R11.1 U2.10 | length 21.2
  Top Layer w0.254: v1(88.17,106.382) 90.407,106.382 U2.10 ; v1(99.695,96.647) 99.653,96.605 99.653,95.546 100.092,95.107 R11.1
  Bottom Layer w0.254: v1(88.17,106.382) 88.214,106.426 90.678,106.426 99.695,97.409 v1(99.695,96.647)
GPIO37: U2.30 U3.9 | length 31.5
  Top Layer w0.254: U3.9 104.648,76.438 104.648,80.518 106.829,82.699 106.829,89.128 108.204,90.502 108.204,98.034 108.966,98.796 108.966,100.019 v2(108.995,100.047) ; U2.30 108.908,105.082 v1(108.961,105.029)
  Bottom Layer w0.254: v1(108.961,105.029) 108.961,100.081 v2(108.995,100.047)
Net*_2: *.2 R10.1 | length 5.4
  Top Layer w0.254: R10.1 109.347,96.597 109.347,97.917 110.56,99.13 *.2
NetBZ1_N: BZ1.N Q1.3 | length 17.3
  Bottom Layer w0.254: BZ1.N 89.75,89.115 94.526,93.891 95.979,93.891
NetD1_1: D1.1 R6.1 | length 2.4
  Top Layer w0.254: R6.1 102.235,59.218 D1.1
NetD2_1: D2.1 R5.1 | length 10.4
  Top Layer w0.254: D2.1 99.166,56.663 99.517,56.312 100.127,56.312 100.686,56.871 100.686,63.17 100.533,63.322 99.349,63.322 R5.1
NetD3_2: D3.2 R8.2 | length 2.4
  Top Layer w0.254: D3.2 94.853,65.667 R8.2
NetD4_1: D4.1 R12.1 | length 28.1
  Top Layer w0.254: D4.1 86.732,104.393 87.377,104.393 v1(88.011,103.759) ; v1(103.906,86.614) 105.902,86.614 R12.1
  Bottom Layer w0.254: v1(88.011,103.759) 94.591,97.179 95.667,97.179 103.886,88.96 103.886,86.634 v1(103.906,86.614)
NetD4_2: D4.2 Q2.3 | length 4.5
  Top Layer w0.254: D4.2 84.637,104.362 84.068,104.362 83.845,104.14 83.845,101.981 84.606,101.22 Q2.3
NetJ1_A5: J1.A5 R3.2 | length 3.6
  Top Layer w0.254: R3.2 86.463,44.287 87.082,44.287 87.904,43.465 J1.A5
NetJ1_B5: J1.B5 R4.2 | length 2.9
  Top Layer w0.254: J1.B5 90.904,44.457 R4.2
NetJ2_A5: J2.A5 R16.2 | length 3.8
  Top Layer w0.254: R16.2 106.68,44.933 106.68,44.323 107.749,43.254 107.749,42.492 ; J2.A5 107.75,42.491
NetJ2_B5: J2.B5 R17.1 | length 3.3
  Top Layer w0.254: J2.B5 110.773,41.773 110.773,42.625 111.328,43.18 111.76,43.18 112.099,43.519 112.099,44.091 R17.1
NetJ4_1: J4.1 U3.11 | length 16.9
  Top Layer w0.254: U3.11 106.362,71.31 106.68,71.628 106.68,81.153 108.712,83.185 110.935,83.185 J4.1
NetJ4_2: J4.2 U3.14 | length 21.9
  Top Layer w0.254: U3.14 105.981,63.69 107.188,64.897 107.188,79.248 108.458,80.518 110.808,80.518 J4.2
NetQ1_1: Q1.1 R11.2 | length 3
  Top Layer w0.254: Q1.1 98.257,93.107 R11.2
NetQ2_1: Q2.1 R13.1 | length 7.4
  Top Layer w0.254: R13.1 84.75,105.87 85.785,104.835 85.785,100.946 Q2.1@86.462,100.27
NetQ3_1: Q3.1 R21.2 | length 2.7
  Top Layer w0.254: R21.2 109.852,55.75 110.252,56.15 Q3.1
NetQ4_1: Q4.1 R25.2 | length 8.5
  Top Layer w0.254: R25.2 106.291,51.291 106.291,50.771 105.983,50.463 105.983,50.06 106.132,49.911 109.079,49.911 110.171,51.003 110.171,51.039 110.334,51.202 110.37,51.202 110.848,51.68 110.848,52.021 Q4.1
NetR9_1: R9.1 U4.2 | length 2.6
  Top Layer w0.254: U4.2 87.248,64.882 R9.1
NetR20_2: R20.2 S1.1 | length 4.3
  Top Layer w0.254: R20.2 88.475,94.5 89.025,95.05 S1.1
NetR23_2: R23.2 S2.1 | length 2.9
  Top Layer w0.254: R23.2 86.839,87.283 87.131,87.283 87.873,88.025 S2.1
RTS: Q3.2 R25.1 U8.14 | length 24.3
  Top Layer w0.254: v1(94.107,49.022) v1(94.107,49.022) 96.249,49.021 U8.14 ; v1(105.341,52.039) 105.341,52.128 105.918,52.705 107.302,52.705 107.629,52.378 107.629,51.899 107.778,51.75 R25.1 109.535,51.75 109.982,52.197 109.982,54.102 110.13,54.25 Q3.2
  Bottom Layer w0.254: v1(94.107,49.022) 94.869,48.26 101.562,48.26 v1(105.341,52.039)
RXDO(GPIO44): U2.36 U8.2 | length 72.6
  Top Layer w0.254: U8.2 102.751,47.751 v1(104.394,47.752) v1(104.394,47.752) ; U2.36 107.99,112.649 v1(110.527,112.649)
  Bottom Layer w0.254: v1(104.394,47.752) 105.537,47.752 110.22,52.435 110.22,79.963 109.92,80.263 109.92,83.697 110.49,84.267 110.49,112.612 v1(110.527,112.649)
TXDO(GPIO43): U2.37 U8.3 | length 73.1
  Top Layer w0.254: U8.3 102.751,49.021 v1(104.394,49.022) v1(104.394,49.022) ; U2.37 108.011,114.046 v1(110.49,114.046)
  Bottom Layer w0.254: v1(104.394,49.022) 106.232,49.022 109.813,52.603 109.813,79.795 109.514,80.095 109.514,84.114 109.855,84.455 109.855,92.417 109.897,92.46 109.897,93.15 109.855,93.193 109.855,113.411 v1(110.49,114.046)
USBC_N: D6.K J2.A7 J2.B7 R18.1 | length 14.7
  Top Layer w0.208: D6.K 108.423,46.223 107.691,46.223 107.569,46.344 107.569,47.117 107.436,47.25 R18.1 107.039,47.591 107.039,47.711 107.161,47.833 108.758,47.833 109.093,47.498 109.393,47.198 109.393,43.831 108.333,42.77 108.333,42.338 108.296,42.301 108.296,41.796 J2.B7 108.25,40.975 108.585,40.64 108.966,40.64 109.25,40.924 J2.A7
USBC_P: D7.K J2.A6 J2.B6 R19.1 | length 13.2
  Top Layer w0.208: D7.K 106.834,48.614 R19.1 107.039,48.409 107.039,48.289 107.161,48.167 108.897,48.167 109.728,47.336 109.728,43.692 109.198,43.162 ; J2.A6 108.704,41.796 108.704,42.301 108.667,42.338 108.667,42.631 109.198,43.162 ; J2.B6 109.75,42.65 109.238,43.162 109.198,43.162
pads on no net: *.3 D3.4 J1. J1.A8 J1.B8 J1.S1 J1.S2 J1.S3 J1.S4 J2. J2.A8 J2.B8 J2.S1 J2.S2 J2.S3 J2.S4 U2.11 U2.12 U2.15 U2.16 U2.18 U2.19 U2.20 U2.23 U2.24 U2.25 U2.26 U2.28 U2.29 U2.31 U2.32 U2.33 U2.34 U2.35 U2.38 U2.39 U2.41_10 U2.41_11 U2.41_12 U2.41_13 U2.41_14 U2.41_15 U2.41_16 U2.41_17 U2.41_18 U2.41_19 U2.41_20 U2.41_21 U3.1 U3.2 U3.3 U3.4 U3.5 U3.6 U3.7 U8.7 U8.8 U8.9 U8.10 U8.11 U8.12 U8.15

## Polygon pours and split planes (outlines as drawn)
GND on Top Layer "GND_L01_P013" (solid, pour order 13): 82.55,119.38 90.234,119.38 114.808,119.38 114.808,34.989 82.55,34.989
+5V on Top Layer "+5V_L01_P012" (solid, pour order 12): 91.186,42.545 91.186,40.894 90.297,40.005 91.948,40.005 91.948,42.545
+5V on Top Layer "+5V_L01_P011" (solid, pour order 11): 86.36,40.132 86.36,42.672 86.487,42.545 87.249,42.545 87.249,41.275 87.122,41.148 88.138,40.132 88.392,40.132
+5V on Top Layer "+5V_L01_P007" (solid, pour order 7): 106.172,42.418 106.934,42.418 107.061,42.291 107.061,39.751 105.918,39.878 106.172,40.259
+5V on Top Layer "+5V_L01_P004" (solid, pour order 4): 111.76,42.418 111.76,39.978 111.86,39.878 110.998,39.878 110.998,42.418
+5V on Top Layer "+5V_L01_P001" (solid, pour order 1): 111.838,38.456 111.838,35.814 105.918,35.814 105.918,39.878 111.86,39.878
+5V on Top Layer "+5V_L01_P000" (solid, pour order 0): 92.28,38.71 92.28,36.068 86.36,36.068 86.36,40.132 92.302,40.132
GND on Int1 (GND) (split plane): 114.425,35.51 83.187,35.51 83.187,126.49 88.265,126.49 88.265,119.253 109.982,119.253 109.982,126.49 114.425,126.49
+3V3 on Int2 (PWR) (split plane): 114.425,97.728 110.236,97.728 110.211,97.723 110.19,97.709 110.176,97.688 110.171,97.663 110.171,91.378 105.602,91.378 105.602,96.774 105.597,96.799 105.583,96.82 105.562,96.834 105.537,96.839 95.758,96.839 95.733,96.834 95.712,96.82 95.698,96.799 95.693,96.774 95.693,75.819 95.698,75.794 95.712,75.773 95.733,75.759 95.758,75.754 98.106,75.754 98.106,71.882 98.106,69.534 95.758,69.534 95.733,69.529 95.712,69.515 95.698,69.494 95.693,69.469 95.693,58.801 95.698,58.776 95.712,58.755 95.733,58.741 95.758,58.736 97.028,58.736 97.053,58.741 97.074,58.755 97.088,58.776 97.093,58.801 97.093,65.086 100.646,65.086 100.646,59.563 100.651,59.538 100.665,59.517 100.686,59.503 100.711,59.498 105.472,59.498 105.472,56.707 100.711,56.707 100.686,56.702 100.665,56.688 100.651,56.667 100.646,56.642 100.646,52.66 100.646,50.8 100.651,50.775 100.665,50.754 100.686,50.74 100.711,50.735 105.47,50.735 105.501,50.704 105.685,50.52 105.685,38.815 92.565,38.815 92.565,47 92.56,47.025 92.546,47.046 92.525,47.06 92.5,47.065 87.815,47.065 87.815,51 87.81,51.025 87.796,51.046 87.775,51.06 87.75,51.065 83.187,51.065 83.187,126.49 88.265,126.49 88.265,119.38 109.855,119.38 109.855,126.49 114.425,126.49
+5V on Int2 (PWR) (split plane): 114.425,35.51 83.187,35.51 83.187,50.935 87.685,50.935 87.685,47 87.69,46.975 87.704,46.954 87.725,46.94 87.75,46.935 92.435,46.935 92.435,38.75 92.44,38.725 92.454,38.704 92.475,38.69 92.5,38.685 105.75,38.685 105.775,38.69 105.796,38.704 105.81,38.725 105.815,38.75 105.815,50.547 105.81,50.572 105.796,50.593 105.593,50.796 105.543,50.846 105.522,50.86 105.497,50.865 100.776,50.865 100.776,52.66 100.776,56.577 105.537,56.577 105.562,56.582 105.583,56.596 105.597,56.617 105.602,56.642 105.602,59.563 105.597,59.588 105.583,59.609 105.562,59.623 105.537,59.628 100.776,59.628 100.776,65.151 100.771,65.176 100.757,65.197 100.736,65.211 100.711,65.216 97.028,65.216 97.003,65.211 96.982,65.197 96.968,65.176 96.963,65.151 96.963,58.866 95.823,58.866 95.823,69.404 98.171,69.404 98.196,69.409 98.217,69.423 98.231,69.444 98.236,69.469 98.236,75.819 98.231,75.844 98.217,75.865 98.196,75.879 98.171,75.884 95.823,75.884 95.823,96.709 105.472,96.709 105.472,91.313 105.477,91.288 105.491,91.267 105.512,91.253 105.537,91.248 110.236,91.248 110.261,91.253 110.282,91.267 110.296,91.288 110.301,91.313 110.301,97.598 114.425,97.598

## Keep-outs
Keep-Out Layer:
  rectangle: 88.392,119.253 110.109,127
  rectangle: 88.392,119.253 110.109,127

## Other copper
Int1 (GND) (plane layer: these items are gaps in the copper):
  rectangle: 88.265,119.253 109.982,126.873
Int2 (PWR) (plane layer: these items are gaps in the copper):
  rectangle: 88.265,119.38 109.855,126.873
  lines w0.127: 82.75,50.75 82.75,51 87.75,51 87.75,47 92.5,47 92.5,38.75 105.25,38.75 105.75,38.75 105.75,50.547 105.547,50.75 105.497,50.8 104.014,50.8 100.711,50.8 100.711,52.66 100.711,56.642 105.537,56.642 105.537,59.563 100.711,59.563 100.711,65.151 97.028,65.151 97.028,58.801 95.758,58.801 95.758,69.469 98.171,69.469 98.171,75.819 ; 98.171,71.882 98.171,75.819 ; 105,50.5 105.25,50.5 ; 114.935,96.774 114.935,97.663 110.236,97.663 110.236,91.313 105.537,91.313 105.537,96.774 95.758,96.774 95.758,75.819 ; 95.758,75.819 98.171,75.819 ; 95.758,75.819 95.758,75.819

## Silkscreen, mask and mechanical layers (free items; w line width, h text height)
Top Overlay:
  text "LED" at 83.874,103.578 h0.7 r90
  text "GND" at 111.179,103.197 h0.8 r90
  text "SIG" at 111.306,98.117 h0.8 r90
  text "5V" at 111.306,95.831 h0.8 r90
  text "RST" at 89.735,92.529 h0.8
  text "GND" at 111.052,92.021 h0.8 r90
  text "LDR" at 104.575,90.624 h0.8 r90
  text "SIG" at 111.052,89.354 h0.8 r90
  text "5V" at 111.052,87.195 h0.8 r90
  text "BOOT" at 89.481,85.163 h0.8
  text "GND" at 83.766,69.161 h0.8
  text "RGB" at 89.227,60.017 h0.8
  text "3V3" at 83.766,59.89 h0.8
Bottom Overlay:
  text "HZ" at 114.1,125.549 h0.7
  text "GAS SENSOR" at 110.925,104.194 h0.8 r90
  text "SERVO" at 110.798,92.51 h0.8 r90
  text "TEAM9" at 104.402,81.399 h2.5
  text "PIR SENSOR" at 87.43,68.634 h0.8 r90
  text "USB" at 90.224,36.141 h0.8
  text "COM" at 109.782,36.014 h0.8

## Text inside footprints (layer, text, board x,y; h text height)
BZ1: Top Overlay "+" at 90.321,68.594 h1.27 r90; Top Overlay "-" at 90.321,82.843 h1.27 r90
U2: Mechanical 13 "ANTENNA" at 94.687,122.022 h1.27
U8: Top Overlay "1" at 103.589,45.972 h1 r180; Top Overlay "8" at 103.516,56.932 h1 r180; Top Overlay "9" at 95.622,56.809 h1 r180; Top Overlay "16" at 96.35,45.845 h1 r180